# Allegro board Pot.brd
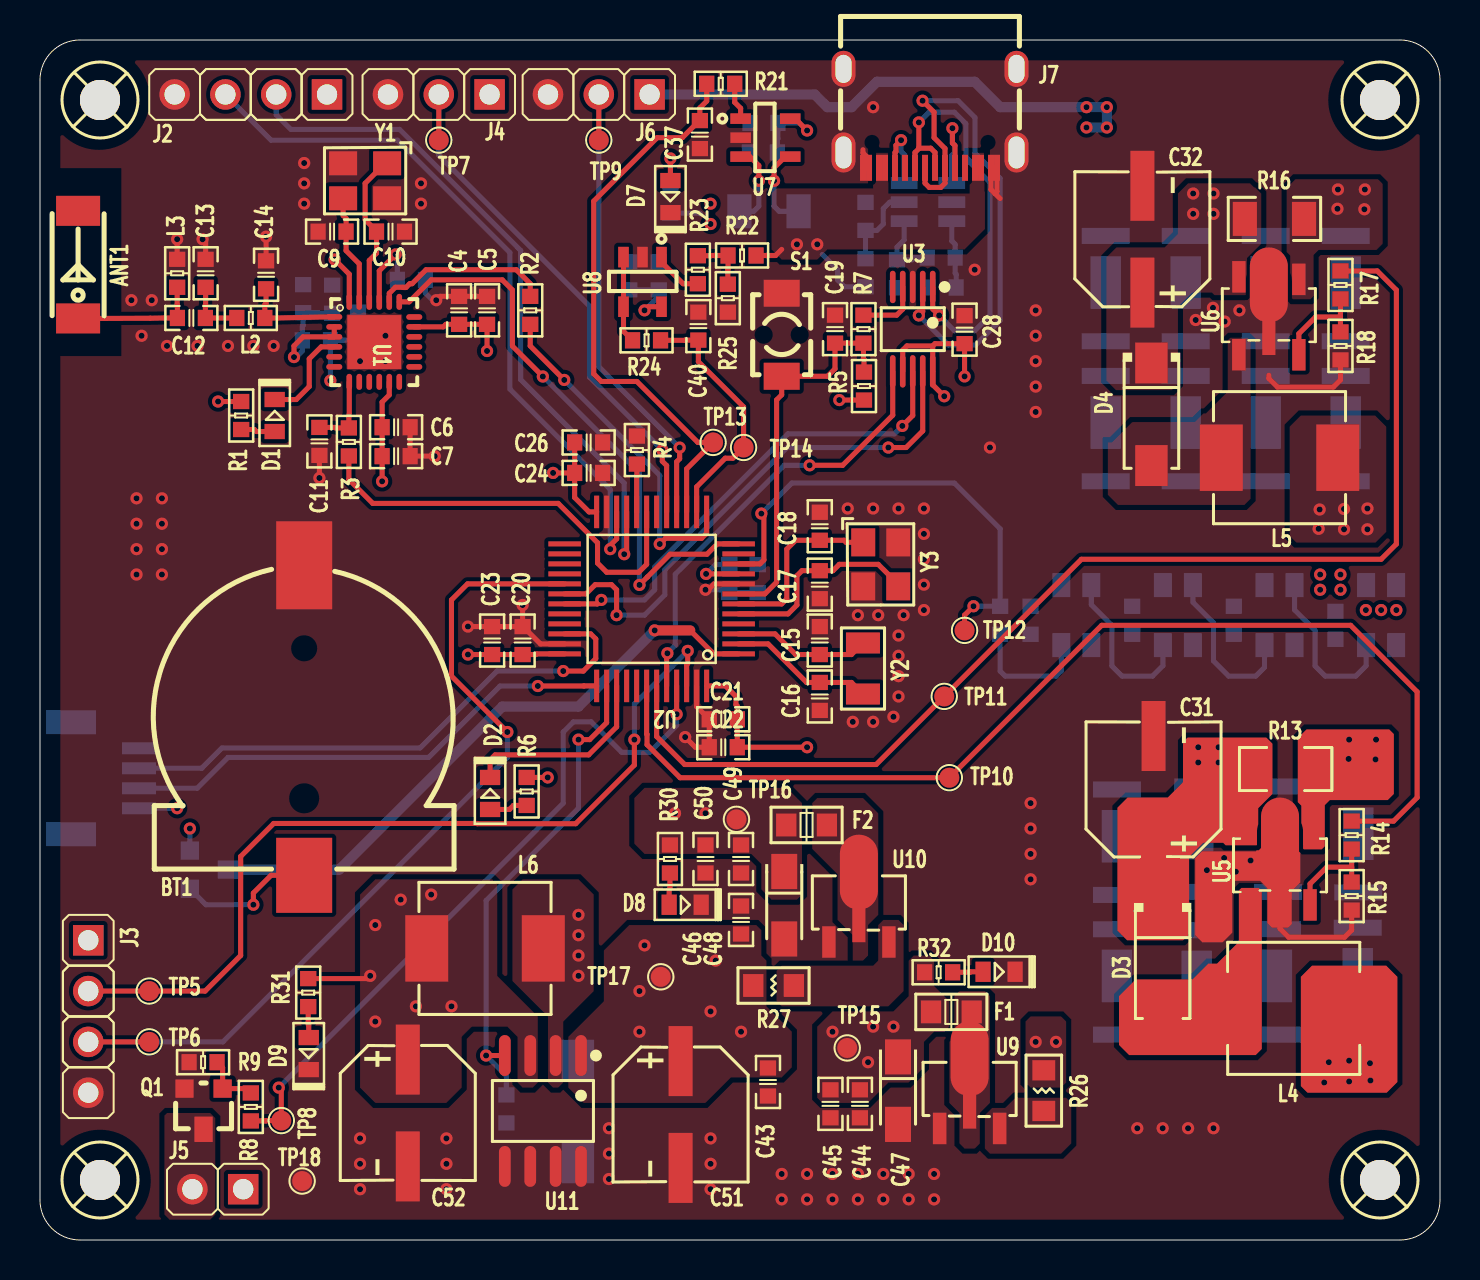
[diagram p0: board, top side]
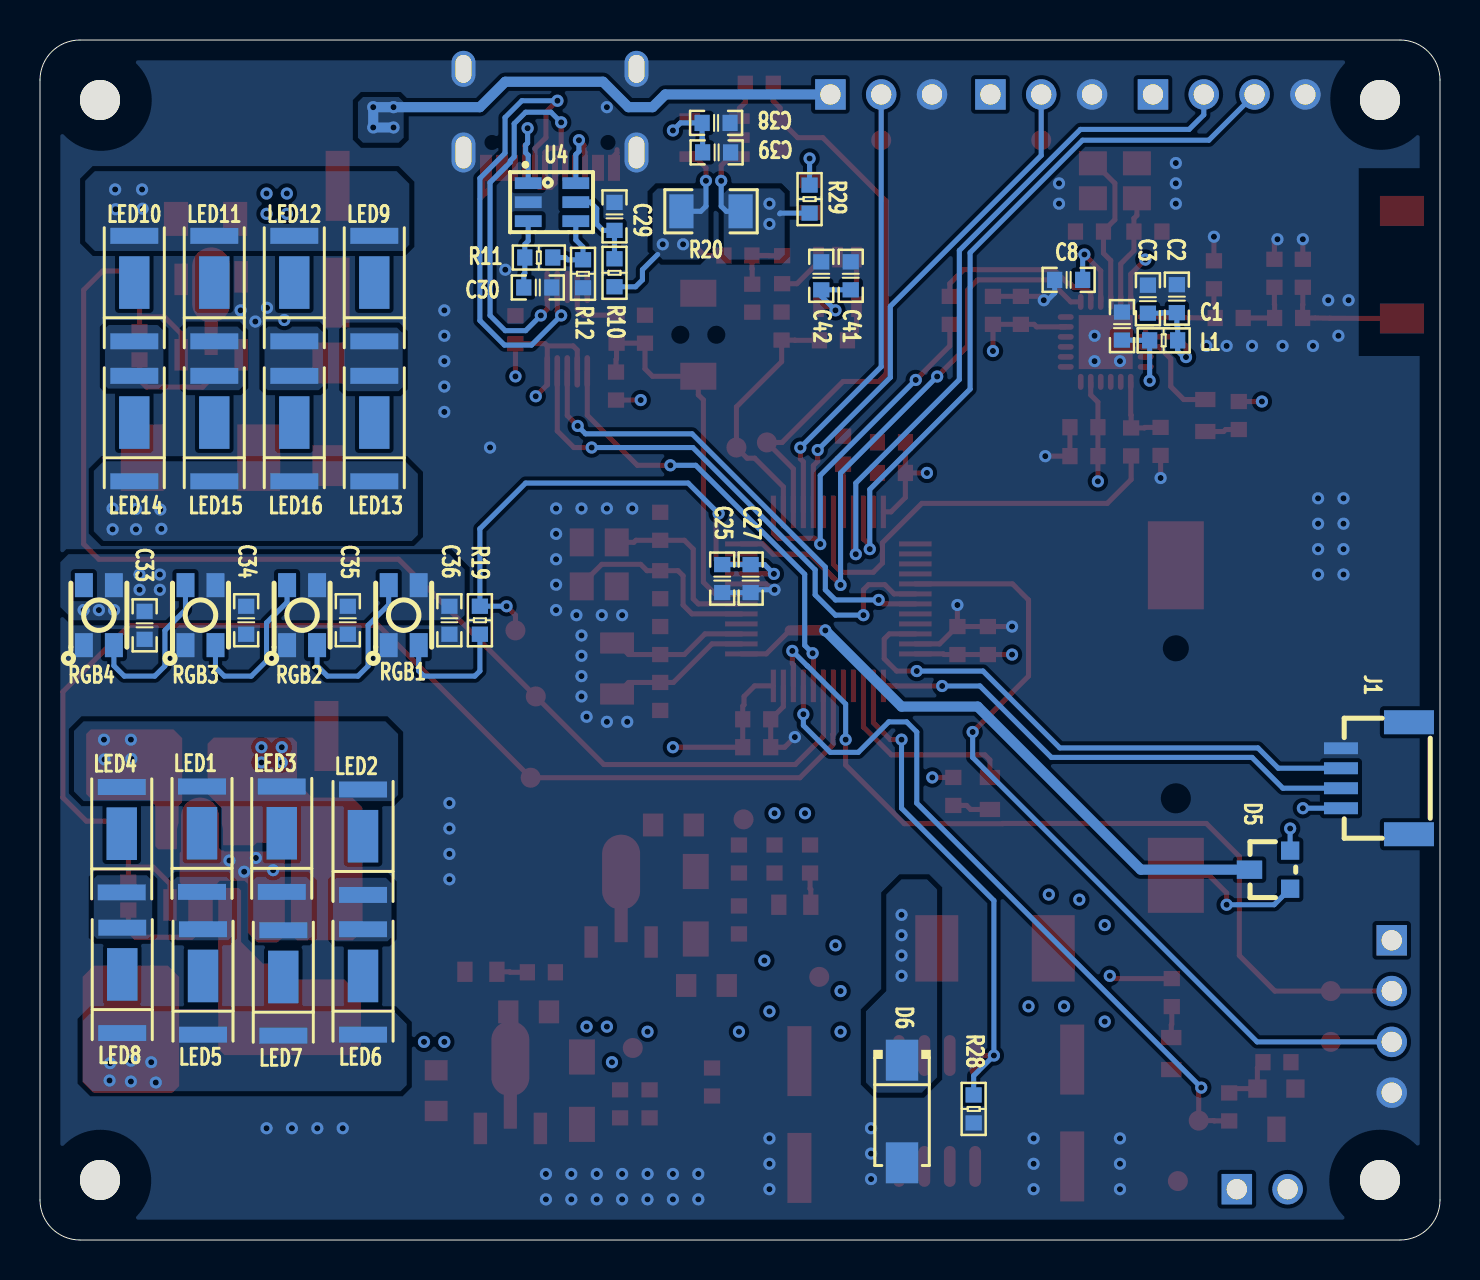
[diagram p1: board, bottom side, seen from below]

Outline 70 x 60 mm; copper layers: TOP, VCC, GND, BOTTOM. Coordinates in mm from the lower left corner of the outline.
Outline path: 0,58 0,2 arc(0.59,0.59) 2,0 68,0 arc(69.41,0.59) 70,2 70,58 arc(69.41,59.41) 68,60 2,60 arc(0.59,59.41) 0,58

## Design rules (mm)
constraint set DEFAULT: min track width 0.152
net group ESP_EN: nets ESP_EN N03599
net group ESP_TX: nets ESP_TX N07057
net group N412627: nets N412627 N971264
net group N412637: nets N412637 N970498
net group N412641: nets N412641 N977730
net group N412645: nets N412645 N976739
net group N412649: nets N412649 N976755
net group N412665: nets N412665 N980610
net group N971301: nets N971301 N971428
net group N972307: nets N972307 N972331
net group NRST: nets N970458 NRST
net group ANT: nets ANT N05484 N05522

## Placement (name value [footprint] x y rotation side)
ANT1  AN2051-245  [ANT-SMD-2X5_1]  1.91 48.77 90 top
BT1  CR1220  [CR1220_SMD]  13.21 25.98 270 top
C1  0.1uF  [C0603]  15.9 45.69 270 bottom
C2  0.1uF  [C0603]  13.16 47.07 270 bottom
C3  10uF  [C0603]  14.61 47.04 270 bottom
C4  0.1uF  [C0603]  20.95 46.48 270 top
C5  0.1uF  [C0603]  22.35 46.48 270 top
C6  0.1uF  [C0603]  17.81 40.64 180 top
C7  0.1uF  [C0603]  17.81 39.19 180 top
C8  10uF  [C0603]  18.57 48.01 180 bottom
C9  15pF  [C0603]  14.61 50.42 0 top
C10  15pF  [C0603]  17.53 50.42 0 top
C11  0.1uF  [C0603]  13.97 39.93 90 top
C12  0.1uF  [C0603]  7.57 46.1 0 top
C13  1.8pF  [C0603]  8.28 48.34 90 top
C14  1.8pF  [C0603]  11.3 48.26 90 top
C15  20pF  [C0603]  38.99 29.97 270 top
C16  20pF  [C0603]  38.99 27.18 270 top
C17  20pF  [C0603]  38.99 32.77 90 top
C18  20pF  [C0603]  38.99 35.69 90 top
C19  0.1uF  [C0603]  39.75 45.54 270 top
C20  2.2uF  [C0603]  24.13 29.97 270 top
C21  0.1uF  [C0603]  34.16 26.04 0 top
C22  2.2uF  [C0603]  34.16 24.64 0 top
C23  0.1uF  [C0603]  22.61 29.97 270 top
C24  2.2uF  [C0603]  27.43 38.35 180 top
C25  0.1uF  [C0603]  35.89 33.07 90 bottom
C26  2.2uF  [C0603]  27.43 39.88 180 top
C27  0.1uF  [C0603]  34.47 33.07 90 bottom
C28  0.1uF  [C0603]  46.23 45.52 270 top
C29  1uF  [C0603]  41.27 51.18 270 bottom
C30  0.1uF  [C0603]  45.11 47.62 0 bottom
C31  100uF  [CAP_SMD-6_3X7_7]  55.68 22.53 90 top
C32  100uF  [CAP_SMD-6_3X7_7]  55.12 50.04 90 top
C33  2.2uF  [C0603]  64.77 30.73 90 bottom
C34  2.2uF  [C0603]  59.69 30.99 90 bottom
C35  2.2uF  [C0603]  54.61 30.99 90 bottom
C36  2.2uF  [C0603]  49.53 30.99 90 bottom
C37  0.1uF  [C0603]  32.99 55.27 90 top
C38  0.1uF  [C0603]  36.2 55.85 0 bottom
C39  0.1uF  [C0603]  36.17 54.38 0 bottom
C40  0.1uF  [C0603]  32.92 45.69 270 top
C41  0.1uF  [C0603]  29.46 48.21 270 bottom
C42  0.1uF  [C0603]  30.94 48.21 270 bottom
C43  10uF  [C0603]  36.4 7.9 90 top
C44  10uF  [C0603]  41 6.81 90 top
C45  0.1uF  [C0603]  39.52 6.81 90 top
C46  10uF  [C0603]  35.05 16 270 top
C47  10uF  [CASE-A-3216]  42.9 7.47 270 top
C48  10uF  [CASE-A-3216]  37.21 16.74 270 top
C49  10uF  [C0603]  35.05 19.05 90 top
C50  0.1uF  [C0603]  33.27 19.05 90 top
C51  100uF  [CAP_SMD-6_3X7_7]  32.03 6.27 270 top
C52  100uF  [CAP_SMD-6_3X7_7]  18.39 6.35 270 top
D1  Green  [LED0603]  11.73 41.22 90 top
D2  Green  [LED0603]  22.5 22.33 90 top
D3  SS34  [SMA_DO-214AC]  56.13 13.78 270 top
D4  SS34  [SMA_DO-214AC]  55.57 41.29 270 top
D5  BAT54C,215  [SOT-23]  8.48 18.52 90 bottom
D6  SS34  [SMA_DO-214AC]  26.9 6.43 270 bottom
D7  Green  [LED0603]  31.52 52.17 270 top
D8  Green  [LED0603]  32.26 16.76 0 top
D9  Green  [LED0603]  13.44 9.32 270 top
D10  Green  [LED0603]  47.96 13.41 0 top
F1  FUSE  [F0805]  45.57 11.4 180 top
F2  FUSE  [F0805]  38.33 20.75 180 top
J1  SWD  [CON_1-4P-SMD]  3.25 23.09 90 bottom
J2  UART3  [CON_254-4P]  10.54 57.28 180 top
J3  FAN  [CON_254-4P]  2.41 11.18 270 top
J4  DHT11  [CON_254-3P]  19.94 57.28 180 top
J5  PUMP  [CON_254-2P]  8.89 3.81 180 top
J6  Liquid_Sensor  [CON_254-3P]  27.94 57.28 180 top
J7  Type-C 12P  [TYPE-C-12P]  44.5 56.08 180 top
L1  2nH  [R0603]  13.82 44.98 180 bottom
L2  2.4nH  [R0603]  10.54 46.1 180 top
L3  NC  [R0603]  6.86 48.34 270 top
L4  68uH 2.5A  [IND-SMD_7_1X6_6MM]  62.69 11.58 0 top
L5  68uH 2.5A  [IND-SMD_7_1X6_6MM]  61.98 39.12 0 top
L6  68uH 2.5A  [IND-SMD_7_1X6_6MM]  22.25 14.58 180 top
LED1  White  [SMD5730]  61.9 20.04 90 bottom
LED2  White  [SMD5730]  53.85 19.89 90 bottom
LED3  White  [SMD5730]  57.91 20.04 90 bottom
LED4  White  [SMD5730]  65.91 20.02 90 bottom
LED5  White  [SMD5730]  61.85 12.9 90 bottom
LED6  White  [SMD5730]  53.85 12.9 90 bottom
LED7  White  [SMD5730]  57.84 12.85 90 bottom
LED8  White  [SMD5730]  65.89 12.98 90 bottom
LED9  Warm_White  [SMD5730]  53.29 47.57 90 bottom
LED10  Warm_White  [SMD5730]  65.29 47.57 90 bottom
LED11  Warm_White  [SMD5730]  61.29 47.57 90 bottom
LED12  Warm_White  [SMD5730]  57.29 47.57 90 bottom
LED13  Warm_White  [SMD5730]  53.29 40.57 90 bottom
LED14  Warm_White  [SMD5730]  65.29 40.57 90 bottom
LED15  Warm_White  [SMD5730]  61.29 40.57 90 bottom
LED16  Warm_White  [SMD5730]  57.29 40.57 90 bottom
Q1  SI2302  [SOT-23]  8.18 6.58 180 top
R1  1K  [R0603]  10.06 41.22 270 top
R2  499R  [R0603]  24.51 46.48 90 top
R3  10K  [R0603]  15.44 39.9 90 top
R4  4.7K  [R0603]  29.84 39.5 270 top
R5  1K  [R0603]  41.2 42.7 90 top
R6  470R  [R0603]  24.33 22.43 270 top
R7  1K  [R0603]  41.17 45.54 90 top
R8  1R  [R0603]  10.54 6.65 270 top
R9  1K  [R0603]  8.15 8.89 180 top
R10  470R  [R0603]  41.27 48.36 270 bottom
R11  120K  [R0603]  45.06 49.12 180 bottom
R12  200K  [R0603]  42.85 48.31 270 bottom
R13  0.1R  [R1206]  62.28 23.55 180 top
R14  200R  [R0603]  65.58 20.24 270 top
R15  2.2K  [R0603]  65.58 17.2 90 top
R16  0.1R  [R1206]  61.72 51.05 180 top
R17  200R  [R0603]  65.02 47.75 270 top
R18  2.2K  [R0603]  65.02 44.7 90 top
R19  0R  [R0603]  48.01 30.99 270 bottom
R20  18mR  [R1206]  36.45 51.44 0 bottom
R21  10R  [R0603]  34.04 57.81 0 top
R22  12K  [R0603]  35.1 49.23 180 top
R23  1K  [R0603]  32.89 48.51 270 top
R24  10R  [R0603]  30.33 44.98 180 top
R25  3.3K  [R0603]  34.39 47.09 270 top
R26  1R  [R0805]  50.19 7.47 270 top
R27  1R  [R0805]  36.68 12.73 0 top
R28  10K  [R0603]  23.32 6.55 90 bottom
R29  1K  [R0603]  31.52 52.04 90 bottom
R30  1K  [R0603]  31.5 19.05 270 top
R31  1K  [R0603]  13.41 12.37 270 top
R32  1K  [R0603]  44.93 13.39 0 top
RGB1  WS2812  [RGB3528]  51.82 31.24 270 bottom
RGB2  WS2812  [RGB3528]  56.9 31.24 270 bottom
RGB3  WS2812  [RGB3528]  61.98 31.24 270 bottom
RGB4  WS2812  [RGB3528]  67.06 31.24 270 bottom
S1  KEY-SMD  [KEY_SMD]  37.08 45.26 270 top
TP1  M2  [SCREW_M2]  3 57 0 top
TP2  M2  [SCREW_M2]  67 57 0 top
TP3  M2  [SCREW_M2]  67 3 0 top
TP4  M2  [SCREW_M2]  3 3 0 top
TP5  SMD  [TP_SMD]  5.46 12.45 0 top
TP6  SMD  [TP_SMD]  5.46 9.91 0 top
TP7  SMD  [TP_SMD]  19.94 54.99 0 top
TP8  SMD  [TP_SMD]  12.06 5.97 0 top
TP9  SMD  [TP_SMD]  27.94 54.99 0 top
TP10  SMD  [TP_SMD]  45.47 23.11 0 top
TP11  SMD  [TP_SMD]  45.21 27.18 0 top
TP12  SMD  [TP_SMD]  46.23 30.48 0 top
TP13  SMD  [TP_SMD]  33.66 39.88 0 top
TP14  SMD  [TP_SMD]  35.18 39.62 0 top
TP15  SMD  [TP_SMD]  40.36 9.6 0 top
TP16  SMD  [TP_SMD]  34.82 21.03 0 top
TP17  SMD  [TP_SMD]  31.04 13.16 0 top
TP18  SMD  [TP_SMD]  13.11 2.95 0 top
U1  ESP8684H4  [QFN24-EP-4X4]  16.71 44.91 270 top
U2  STM32F103CBT6  [LQFP_48]  30.58 32.05 180 top
U3  CH340X  [MSOP-10]  43.64 45.54 180 top
U4  PW6603  [SOT23-6]  44.4 51.89 270 bottom
U5  PT4115-MS  [SOT-89-5]  62.03 18.72 270 top
U6  PT4115-MS  [SOT-89-5]  61.47 46.23 270 top
U7  INA180A2IDBVR  [SOT23-5]  36.27 55.12 270 top
U8  LM321  [SOT23-5]  30.12 47.9 180 top
U9  AMS1117_3.3  [SOT-89-3]  46.48 7.52 270 top
U10  AMS1117-5.0  [SOT-89-3]  40.94 16.84 270 top
U11  XL1509-5.0E1  [SOIC-8]  25.15 6.45 180 top
Y1  40MHz  [CRYSTAL_SMD3225-4P]  16.26 52.96 180 top
Y2  32.768kHz  [CRYSTAL_SMD3215-2P]  41.15 28.57 90 top
Y3  8Mhz  [CRYSTAL_SMD3225-4P]  42.04 33.78 270 top

## Library data of the parts
ANT1 = ANT
BT1 = BATTERY
C1-C30 C33-C46 C49 C50 = C
C31 C32 C51 C52 = CE
C47 C48 = CAP
D1 D2 D7-D10 = LED
D3 D4 D6 = DIODE SCHOTTKY
D5 = DIODE_Dual1
F1 F2 = FUSE
J1 = CON_6
J2 J3 = CON_4
J4 J6 = CON_3
J5 = CON_2
J7 = TYPE-C_12P_SMD
L1-L6 = L
LED1-LED16 = LED_3P
Q1 = MOSFET-N
R1-R32 = R
RGB1-RGB4 = WS2812
S1 = KEY_D_OPEN
TP1-TP18 = TP
U1 = ESP8684H4
U2 = STM32F103CxTx_48
U3 = CH340X
U4 = PW6603
U5 U6 = PT4115-MS
U7 = INA180
U8 = LM321
U9 U10 = AMS1117_SOT89
U11 = XL1509-5.0E1
Y1 Y3 = CRYSTAL_F
Y2 = CRYSTAL_D

## Footprints (pads in the part's own frame, mm; a bottom-side part is the same pattern mirrored in y, then rotated)
ANT-SMD-2X5_1
  rect 1.5x2.2 smd: 1(-2.69,0) 2(2.69,0)
C0603
  rect 0.762x0.813 smd: 1(-0.7,0) 2(0.7,0)
CAP_SMD-6_3X7_7
  rect 3.5x1.2 smd: 1(-2.67,0) 2(2.67,0)
CASE-A-3216
  rect 1.757x1.296 smd: 1(-1.686,0) 2(1.686,0)
CON_1-4P-SMD
  rect 0.6x1.7 smd: 1(-1.5,1.7) 2(-0.5,1.7) 3(0.5,1.7) 4(1.5,1.7)
  rect 1.2x2.5 smd: 5(2.8,-1.7) 6(-2.8,-1.7)
CON_254-2P
  rect 1.524x1.524 hole 1.016: 1(-1.27,1.27)
  round 1.524 hole 1.016: 2(1.27,1.27)
CON_254-3P
  rect 1.524x1.524 hole 1.016: 1(-2.54,0)
  round 1.524 hole 1.016: 2(0,0) 3(2.54,0)
CON_254-4P
  rect 1.524x1.524 hole 1.016: 1(-3.81,0)
  round 1.524 hole 1.016: 2(-1.27,0) 3(1.27,0) 4(3.81,0)
CR1220_SMD
  rect 3.75x2.8 smd: 1(7.75,0)
  rect 4.4x2.8 smd: 2(-7.75,0)
CRYSTAL_SMD3215-2P
  rect 1.05x1.7 smd: 1(-1.275,0) 2(1.275,0)
CRYSTAL_SMD3225-4P
  rect 1.4x1.2 smd: 1(-1.1,-0.875) 2(1.1,-0.875) 3(1.1,0.875) 4(-1.1,0.875)
F0805
  rect 1.016x1.143 smd: 1(-1.016,0) 2(1.016,0)
IND-SMD_7_1X6_6MM
  rect 2.15x3.32 smd: 1(-2.913,0) 2(2.913,0)
KEY_SMD
  rect 1.35x1.8 smd: 1(-2.075,0) 2(2.075,0)
LED0603
  rect 0.762x1.016 smd: 1(-0.8,0) 2(0.8,0)
LQFP_48
  rect 1.626x0.254 smd: 1(-4.35,2.75) 2(-4.35,2.25) 3(-4.35,1.75) 4(-4.35,1.25) 5(-4.35,0.75) 6(-4.35,0.25) 7(-4.35,-0.25) 8(-4.35,-0.75) 9(-4.35,-1.25) 10(-4.35,-1.75) 11(-4.35,-2.25) 12(-4.35,-2.75) 25(4.35,-2.75) 26(4.35,-2.25) 27(4.35,-1.75) 28(4.35,-1.25) 29(4.35,-0.75) 30(4.35,-0.25) 31(4.35,0.25) 32(4.35,0.75) 33(4.35,1.25) 34(4.35,1.75) 35(4.35,2.25) 36(4.35,2.75)
  rect 0.254x1.626 smd: 13(-2.75,-4.35) 14(-2.25,-4.35) 15(-1.75,-4.35) 16(-1.25,-4.35) 17(-0.75,-4.35) 18(-0.25,-4.35) 19(0.25,-4.35) 20(0.75,-4.35) 21(1.25,-4.35) 22(1.75,-4.35) 23(2.25,-4.35) 24(2.75,-4.35) 37(2.75,4.35) 38(2.25,4.35) 39(1.75,4.35) 40(1.25,4.35) 41(0.75,4.35) 42(0.25,4.35) 43(-0.25,4.35) 44(-0.75,4.35) 45(-1.25,4.35) 46(-1.75,4.35) 47(-2.25,4.35) 48(-2.75,4.35)
MSOP-10
  oval 0.28x1.62 smd: 1(-1,-2.11) 2(-0.5,-2.11) 3(0,-2.11) 4(0.5,-2.11) 5(1,-2.11) 6(1,2.11) 7(0.5,2.11) 8(0,2.11) 9(-0.5,2.11) 10(-1,2.11)
QFN24-EP-4X4
  oval 0.28x0.8 smd: 1(-1.25,-2) 2(-0.75,-2) 3(-0.25,-2) 4(0.25,-2) 5(0.75,-2) 6(1.25,-2) 13(1.25,2) 14(0.75,2) 15(0.25,2) 16(-0.25,2) 17(-0.75,2) 18(-1.242,2)
  oval 0.8x0.28 smd: 7(2,-1.25) 8(2,-0.75) 9(2,-0.25) 10(2,0.25) 11(2,0.75) 12(2,1.25) 19(-2,1.25) 20(-2,0.75) 21(-2,0.25) 22(-2,-0.25) 23(-2,-0.75) 24(-2,-1.25)
  rect 2.7x2.7 smd: 25(0.012,0)
R0603
  rect 0.762x0.813 smd: 1(-0.7,0) 2(0.7,0)
R0805
  rect 1.016x1.143 smd: 1(-1.016,0) 2(1.016,0)
R1206
  rect 1.207x1.701 smd: 1(-1.479,0) 2(1.479,0)
RGB3528
  rect 1.2x0.9 smd: 1(-1.5,0.75) 2(-1.5,-0.75) 3(1.5,-0.75) 4(1.5,0.75)
SCREW_M2
  round 2 hole 2: 1(0,0)
SMA_DO-214AC
  rect 2.047x1.62 smd: 1(2.565,0) 2(-2.565,0)
SMD5730
  rect 0.8x2.4 smd: 1(-2.635,0) 2(2.635,0)
  rect 2.63x1.52 smd: 3(0.3,0)
SOIC-8
  oval 0.588x2.045 smd: 1(-1.905,-2.772) 2(-0.635,-2.772) 3(0.635,-2.772) 4(1.905,-2.772) 5(1.905,2.772) 6(0.635,2.772) 7(-0.635,2.772) 8(-1.905,2.772)
SOT23-5
  rect 0.53x1.03 smd: 1(-0.95,-1.24) 2(0,-1.24) 3(0.95,-1.24) 4(0.95,1.24) 5(-0.95,1.24)
SOT23-6
  rect 0.59x1.34 smd: 1(-0.95,-1.19) 2(0,-1.19) 3(0.95,-1.19) 4(0.95,1.19) 5(0,1.19) 6(-0.95,1.19)
SOT-23
  rect 0.914x0.914 smd: 1(-0.953,-0.991) 2(0.953,-0.991)
  rect 0.914x1.27 smd: 3(0,1.041)
SOT-89-3
  rect 1.575x0.672 smd: 1(1.94,-1.5) 3(1.94,1.5)
  custom 5.377x1.9 smd: 2(-0.737,0)
SOT-89-5
  rect 1.575x0.672 smd: 1(1.966,-1.525) 3(1.966,1.474) 4(-1.803,1.473) 5(-1.93,-1.524)
  custom 5.377x1.9 smd: 2(-0.711,-0.025)
TP_SMD
  round 1.001 smd: 1(0,0)
TYPE-C-12P
  rect 0.3x1.3 smd: A1(-3.35,2.474) A4(-2.55,2.474) A5(-1.25,2.474) A6(-0.25,2.474) A7(0.25,2.474) A8(1.25,2.474) A9(2.55,2.474) A12(3.35,2.474) B1(3.05,2.474) B4(2.25,2.474) B5(1.75,2.474) B6(0.75,2.474) B7(-0.75,2.474) B8(-1.75,2.474) B9(-2.25,2.474) B12(-3.05,2.474)
  oval 1.2x2 hole 0.8x1.6: G1(-4.325,1.706) G2(4.325,1.706)
  oval 1.2x1.8 hole 0.8x1.4: G3(-4.325,-2.474) G4(4.325,-2.474)

## Nets
5V: C33.2 C34.2 C35.2 C36.2 C52.1 J3.1 J5.1 L6.2 R31.1 RGB1.1 RGB2.1 RGB3.1 RGB4.1 U11.3
GND: BT1.2 C1.1 C2.1 C3.1 C4.1 C5.1 C6.1 C7.1 C8.1 C9.1 C10.2 C11.1 C13.2 C14.2 C15.1 C16.2 C17.1 C18.2 C19.1 C20.1 C21.1 C22.1 C23.1 C24.1 C25.1 C26.1 C27.1 C28.1 C29.1 C30.1 C31.2 C32.2 C33.1 C34.1 C35.1 C36.1 C37.1 C38.1 C39.1 C40.1 C41.1 C42.1 C43.1 C44.1 C45.1 C46.1 C47.2 C48.2 C49.1 C50.1 C51.2 C52.2 D6.1 D7.2(\CATHODE\) D8.2(\CATHODE\) D9.2(\CATHODE\) D10.2(\CATHODE\) J1.4 J2.4 J3.4 J4.3 J6.3 J7.A1 J7.A12 J7.B1 J7.B12 J7.G1 J7.G2 J7.G3 J7.G4 L3.1 Q1.2(\S\) R4.1 R9.2 R12.2 R15.1 R18.1 R25.2 R28.1 RGB1.3(\VSS\) RGB2.3(\VSS\) RGB3.3(\VSS\) RGB4.3(\VSS\) S1.1 TP18.1 U1.25 U2.8 U2.23 U2.35 U2.47(\VSS_3\) U3.3 U4.2 U5.2(\VSS\) U6.2(\VSS\) U7.2 U8.2(\V-\) U9.1 U10.1 U11.5 U11.6 U11.7 U11.8 Y1.2 Y1.4 Y3.2 Y3.4
VBAT: D5.3 U2.1
VBUS: J7.A4 J7.A9 J7.B4 J7.B9(\VBUS4\) R10.2 R20.2 R22.1 U7.4
VCC3V3: C1.2 C4.2 C5.2 C6.2 C7.2 C8.2 C20.2 C21.2 C22.2 C23.2 C24.2 C25.2 C26.2 C27.2 C28.2 C44.2 C45.2 C47.1 D5.2 F1.2 J1.1 J2.1 J4.1 J6.1 L1.1 R1.1 R5.1 R6.1 R32.1 TP15.1 U1.11 U1.17 U1.21 U1.24 U2.9 U2.24 U2.36 U2.48 U3.7(\VCC\) U3.10
VCC5V: C38.2 C39.2 C41.2 C42.2 C48.1 C49.2 C50.2 F2.2 R30.1 TP16.1 U7.5(\VS\) U8.5
VIN: C31.1 C32.1 C43.2 C46.2 C51.1 D3.2 D4.2 R13.2 R16.2 R20.1 R26.1 R27.1 R29.1 TP17.1 U5.5 U6.5 U7.3 U11.1(\VIN\)
ANT: C14.1 L2.1 U1.1
BOOT0: U2.44 U3.6
CC1: J7.A5 U4.1
CC2: J7.B5 U4.6
ESP_EN: R3.1 U2.19
ESP_RX: U1.19 U2.12
ESP_TX: R2.1 U2.13
NRST: C19.2 R5.2 R7.1 S1.2 U2.7
RUNLED: D2.2(\CATHODE\) U2.39
SWCLK: J1.2 U2.37
SWDIO: J1.3 U2.34
UART1_RX: U2.31 U3.8
UART1_TX: U2.30 U3.9
UART3_RX: J2.3 U2.22
UART3_TX: J2.2 U2.21
N02117: C2.2 C3.2 L1.2 U1.2 U1.3
N02887: C9.2 U1.23(\XTAL_P\) Y1.3
N02894: C10.1 U1.22 Y1.1
N03599: C11.2 R3.2 U1.7
N05484: ANT1.1 C12.1 L3.2
N05522: C12.2 C13.1 L2.2
N07057: R2.2 U1.20
N07224: D1.2(\CATHODE\) U1.4
N07266: D1.1 R1.2
N07583: C17.2 U2.5 Y3.3
N07657: C18.1 U2.6 Y3.1
N412615: R28.2 U2.38 U11.4
N412619: J7.A7 J7.B7 U3.2
N412623: J7.A6 J7.B6 U3.1
N412627: C40.2 R24.1 TP14.1 U2.14
N412637: C37.2 R21.1 TP13.1 U2.15
N412641: R19.1 TP12.1 U2.10
N412645: R14.1 TP10.1 U2.42
N412649: R17.1 TP11.1 U2.43
N412653: J4.2 TP7.1 U2.17
N412657: J3.3 TP6.1 U2.29
N412661: J3.2 TP5.1 U2.46
N412665: R8.2 TP8.1 U2.45
N412669: J6.2 TP9.1 U2.16
N925463: BT1.1 D5.1
N926709: R26.2 U9.3
N926755: R27.2 U10.3
N965642: LED9.2 LED10.2 LED11.2 LED12.2 R16.1 U6.4
N965955: LED1.2 LED2.2 LED3.2 LED4.2 R13.1 U5.4
N970458: R7.2 U3.4
N970498: R21.2 U7.1
N970971: D6.2 L6.1 U11.2
N971264: R24.2 U8.3 U8.4
N971301: R23.2 U8.1
N971428: R22.2 R23.1 R25.1
N972307: C30.2 R11.1 U4.3(\VDD\)
N972331: R11.2 R12.1 U4.4
N972587: C29.2 R10.1 U4.5
N974356: D3.1 L4.1 U5.1
N974481: L4.2 LED5.1 LED6.1 LED7.1 LED8.1
N975120: D4.1 L5.1 U6.1
N975748: L5.2 LED13.1 LED14.1 LED15.1 LED16.1
N976739: R14.2 R15.2 U5.3
N976755: R17.2 R18.2 U6.3
N977400: RGB1.2 RGB2.4
N977412: RGB2.2 RGB3.4
N977424: RGB3.2 RGB4.4
N977730: R19.2 RGB1.4
N978475: LED1.1 LED5.2
N978501: LED2.1 LED6.2
N978505: LED3.1 LED7.2
N978542: LED4.1 LED8.2
N978748: LED9.1 LED13.2
N978752: LED10.1 LED14.2
N978756: LED11.1 LED15.2
N978760: LED12.1 LED16.2
N980521: J5.2 Q1.3
N980610: Q1.1 R8.1 R9.1
N983243: C15.2 U2.3 Y2.2
N983423: C16.1 U2.2 Y2.1
N983853: R4.2 U2.20
N984382: D2.1 R6.2
N984467: D7.1 R29.2
N984970: D8.1 R30.2
N985220: D9.1 R31.2
N985464: D10.1 R32.2
N9251661: F1.1 U9.2(\VOUT\)
N9263520: F2.1 U10.2(\VOUT\)

Pads without a net: ANT1 2; J1 5 6; J7 A8 B8; LED1 3; LED2 3; LED3 3; LED4 3; LED5 3; LED6 3; LED7 3; LED8 3; LED9 3; LED10 3; LED11 3; LED12 3; LED13 3; LED14 3; LED15 3; LED16 3; RGB4 2; TP1 1; TP2 1; TP3 1; TP4 1; U1 5 6 8 9 10 12 13 14 15 16 18; U2 4 11 18 25 26 27 28 32 33 40 41; U3 5

## Via types
v1: diameter 0.61, hole 0.305, TOP to BOTTOM, 225 vias

## Routing (per net, layer and track width the routed paths; a pad name or vN(x,y) marks a point on that pad's centre or on a via; arc(x,y) is an arc through that point)
5V: length 3.2
  TOP w0.254: v1(16.51,13.21) 16.37,13.07 R31.1
  vias: v1(16.76,15.75) v1(16.76,10.92) v1(18.03,17.02) v1(18.8,11.68) v1(19.56,17.27) v1(20.57,11.68) v1(64.01,33.27) v1(64.01,32.51) v1(65.02,33.27) v1(65.02,32.51) v1(66.29,31.5) v1(67.06,31.5) v1(67.82,31.5)
GND: length 41.3
  TOP w0.254: 62,15.73 62,15.57 62.43,15.14 65.23,15.14 65.58,15.49 R15.1 ; 47.75,52.32 47.55,52.53 J7.B12 J7.A1 47.85,52.42 47.75,52.32 ; 47.75,52.32 48.01,52.07 ; C20.1 v1(24.13,31.75) ; C20.1 C23.1 v1(21.4,30.67) ; C20.1 24.16,30.67 25.02,29.8 U2.35 ; C11.1 v1(13.97,38.1) ; R18.1 65.02,43 64.67,42.65 61.87,42.65 61.44,43.08 61.44,43.23 ; U2.8 33.7,32.8 33.41,32.51 v1(33.27,32.51) ; C6.1 C7.1 v1(19.74,39.19) ; 41.15,54.51 41.15,54.36 41.45,54.05 J7.B1 J7.A12 ; C13.2 8.28,49.89 v1(8.13,50.04) ; v1(19.81,46.99) 20,47.18 C4.1 C5.1 ; L3.1 v1(6.86,50.04) ; C14.2 v1(11.3,50.16) ; U2.47 32.83,26.67 C21.1 C22.1 32.77,24.64 v1(32.26,25.15)
  BOTTOM w0.254: v1(19.81,46.99) 19.62,46.99 19.27,47.35 C8.1 ; v1(33.27,32.51) 34.33,32.51 C27.1 C25.1
  vias: v1(4.57,46.99) v1(4.83,37.08) v1(4.83,35.81) v1(4.83,34.54) v1(4.83,33.27) v1(5.08,45.21) v1(5.59,46.99) v1(6.1,37.08) v1(6.1,35.81) v1(6.1,34.54) v1(6.1,33.27) v1(6.35,44.7) v1(7.87,44.7) v1(9.4,44.7) v1(10.67,44.7) v1(11.68,44.7) v1(13.21,53.85) v1(13.21,52.83) v1(13.21,51.82) v1(16,43.94) v1(16,5.08) v1(16,3.81) v1(16,2.54) v1(17.27,45.21) v1(17.27,43.94) v1(19.05,52.83) v1(19.05,51.82) v1(20.32,5.08) v1(20.32,3.81) v1(20.32,2.54) v1(28.45,5.59) v1(28.45,4.32) v1(28.45,3.05) v1(33.53,5.08) v1(33.53,3.81) v1(33.53,2.54) v1(37.08,3.3) v1(37.08,2.03) v1(38.35,3.3) v1(38.35,2.03) v1(39.62,3.3) v1(39.62,2.03) v1(40.39,36.58) v1(40.64,25.91) v1(40.89,31.24) v1(40.89,3.3) v1(40.89,2.03) v1(41.66,56.64) v1(41.66,36.58) v1(41.66,25.91) v1(41.91,31.24) v1(42.16,3.3) v1(42.16,2.03) v1(42.67,26.16) v1(42.93,36.58) v1(42.93,30.23) v1(42.93,29.21) v1(42.93,28.19) v1(42.93,27.18) v1(43.18,31.24) v1(43.43,3.3) v1(43.43,2.03) v1(44.2,36.58) v1(44.2,35.31) v1(44.2,34.04) v1(44.2,32.77) v1(44.2,31.5) v1(44.7,3.3) v1(44.7,2.03) v1(46.74,48.51) v1(47.5,39.62) v1(49.53,21.84) v1(49.53,20.57) v1(49.53,19.3) v1(49.53,18.03) v1(49.78,46.48) v1(49.78,45.21) v1(49.78,43.94) v1(49.78,42.67) v1(49.78,41.4) v1(54.86,5.59) v1(56.13,5.59) v1(57.4,5.59) v1(57.78,46) v1(58.34,18.49) v1(58.65,46.61) v1(58.67,5.59) v1(59.23,45.92) v1(59.21,19.1) v1(59.79,18.41) v1(59.97,46.48) v1(60.53,18.97)
VBAT: length 30.8
  TOP w0.254: U2.1 33.69,29.3 32.51,30.48
  TOP w0.508: v1(30.73,30.48) 32.51,30.48
  BOTTOM w0.508: v1(30.73,30.48) 26.92,26.67 23.11,26.67 14.96,18.52 D5.3
VBUS: length 8.8
  TOP w0.254: U7.4 37.26,54.17 36.7,53.61 v1(36.7,52.96) ; 37.08,49.53 36.78,49.23 R22.1
  BOTTOM w0.254: 39.12,49.28 39.88,48.51 39.88,48.01 40.22,47.66 R10.2 ; v1(36.7,52.96) 36.7,51.69 36.96,51.44 R20.2
  vias: v1(37.85,49.78) v1(38.86,49.78)
VCC3V3: length 83.5
  TOP w0.254: U1.21 16.96,48.46 v1(17.78,49.28) ; C24.2 C26.2 ; C24.2 v1(25.65,38.35) ; C24.2 26.73,37.12 27.45,36.4 U2.24 ; 44.64,44.7 43.34,44.7 43.14,44.5 U3.7 ; 44.64,44.7 U3.10 44.64,42.76 v1(45.21,42.19) ; 44.64,44.7 44.75,44.82 C28.2 v1(46.23,43.18) ; v1(22.35,44.45) C5.2 C4.2 20.29,45.78 20.17,45.66 U1.17 ; R6.1 v1(25.39,23.13) ; v1(38.35,24.64) C22.2 C21.2 34.86,26.7 34.8,26.76 34.8,27.18 34.27,27.7 U2.48 ; R1.1 v1(8.9,41.92) ; v1(14.73,49.02) 15.46,48.29 U1.24 ; U2.36 24.82,29.3 24.79,29.27 C20.2 C23.2 v1(21.4,29.27) ; U2.9 v1(33.3,33.3) ; R5.1 v1(39.97,42) ; v1(17.11,37.93) C7.2 C6.2 17.11,41.9 17.46,42.25 U1.11
  BOTTOM w0.254: C8.2 17.87,49.19 v1(17.78,49.28) ; C1.2 15.16,44.99 15.15,44.98 L1.1 v1(14.52,42.97) ; D5.2 v1(7.49,20.57) ; C25.2 C27.2 33.77,33.77 v1(33.3,33.3) ; J1.1 v1(6.86,21.59)
  BOTTOM w0.508: v1(52.32,55.63) v1(53.34,55.63) v1(53.34,56.64) v1(52.32,56.64) 48.01,56.64 46.74,57.91 41.85,57.91 40.58,56.64 39.37,56.64 38.73,57.28 J6.1
  vias: v1(39.62,10.41) v1(41.4,8.89) v1(41.66,10.67) v1(42.67,10.67)
VCC5V: length 11.6
  TOP w0.254: v1(38.35,55.48) 37.76,56.07 U7.5 ; v1(30.23,46.48) 30.41,46.66 U8.5
  VCC w0.508: 35.81,53.85 37.59,53.85 38.35,54.61 v1(38.35,55.48)
  BOTTOM w0.254: C41.2 C42.2 30.94,47.19 v1(30.23,46.48) ; C39.2 36.87,55.04 36.89,55.07 C38.2 37.97,55.85 v1(38.35,55.48)
  vias: v1(31.75,21.34) v1(33.27,21.34)
VIN: length 5.7
  TOP w0.254: v1(35.94,52.96) 35.94,53.72 35.49,54.17 U7.3
  BOTTOM w0.254: 33.02,51.31 32.98,51.34 R29.1 ; v1(35.94,52.96) 35.94,51.69 35.69,51.44 R20.1
  vias: v1(29.97,12.45) v1(29.97,10.41) v1(30.23,14.73) v1(33.53,51.82) v1(33.53,50.8) v1(33.53,11.43) v1(33.78,13.97) v1(35.05,10.41) v1(49.78,9.91) v1(50.8,9.91) v1(57.66,52.32) v1(57.66,51.31) v1(57.91,24.64) v1(57.91,23.88) v1(58.67,52.32) v1(58.67,51.31) v1(58.93,24.64) v1(58.93,23.88)
ANT: length 5
  TOP w0.254: U1.1 14.45,46.16 11.88,46.1 L2.1 11.24,46.76 11.3,46.82 C14.1
BOOT0: length 22.1
  TOP w0.254: U3.6 42.64,41.24 40.13,38.73 v1(38.48,38.73) ; v1(31.37,29.34) 31.33,29.3 U2.44
  BOTTOM w0.254: v1(38.48,38.73) 37.21,38.73 31.76,33.29 31.76,29.73 v1(31.37,29.34)
CC1: length 4.9
  TOP w0.254: v1(45.62,55.59) 45.62,54.85 45.75,54.72 J7.A5
  BOTTOM w0.254: U4.1 45.59,54.24 45.72,54.37 45.72,54.75 45.62,54.85 v1(45.62,55.59)
CC2: length 3.7
  TOP w0.254: v1(43.05,54.99) 42.8,54.74 42.8,54.42 42.75,54.38 J7.B5
  BOTTOM w0.254: v1(43.05,54.99) 43.05,54.43 43.21,54.28 U4.6
ESP_EN: length 21.4
  TOP w0.254: R3.1 15.44,38.02 16.64,36.83 25.91,36.83 27.88,34.86 27.88,33.85 28.34,33.39 29.94,33.39 30.33,33.78 U2.19
ESP_RX: length 29.5
  TOP w0.254: U1.19 18.46,46.91 19.56,48.01 23.11,48.01 23.62,47.5 23.62,44.69 v1(25.14,43.18) ; v1(29.97,32.75) 30.37,33.15 31.51,34.29 33.35,34.29 33.86,34.8 U2.12
  BOTTOM w0.254: v1(29.97,32.75) 29.97,33.31 29.97,38.34 v1(25.14,43.18)
ESP_TX: length 17.3
  TOP w0.254: U2.13 33.33,35.34 33.08,35.09 31.28,35.09 v1(30.99,34.8) ; R2.1 24.51,44.7 v1(26.21,43)
  BOTTOM w0.254: v1(30.99,34.8) 30.99,38.23 v1(26.21,43)
NRST: length 19.5
  TOP w0.254: U2.7 36.24,32.3 36.83,32.89 36.83,42 37.08,42.26 S1.2 39.38,43.19 39.75,43.56 C19.2 R7.1 41.17,44.06 41.2,44.03 R5.2
RUNLED: length 9.9
  TOP w0.254: D2.2 22.5,24 22.76,24.26 27.43,24.26 28.83,25.66 U2.39
SWCLK: length 25
  TOP w0.254: v1(24.89,27.7) 27.19,27.7 27.2,27.7 U2.37
  BOTTOM w0.254: J1.2 7.86,22.59 9.4,24.13 19.43,24.13 23,27.7 v1(24.89,27.7)
SWDIO: length 27.8
  TOP w0.254: v1(26.16,28.45) 27.17,28.45 27.79,29.07 27.79,30.05 27.53,30.3 U2.34
  BOTTOM w0.254: v1(26.16,28.45) 22.85,28.45 19.01,24.6 9.1,24.6 8.09,23.59 J1.3
UART1_RX: length 24.2
  TOP w0.254: U2.31 27.87,31.8 v1(28.07,32) ; v1(43.12,40.7) 43.64,41.22 U3.8
  BOTTOM w0.254: v1(43.12,40.7) 42.72,40.31 37.4,40.31 30.73,33.65 30.73,32.51 30.23,32 v1(28.07,32)
UART1_TX: length 27
  TOP w0.254: v1(42.42,39.62) 43.31,39.62 44.14,40.45 U3.9 ; U2.30 27.3,32.3 27.76,32.77 28.57,32.77 28.83,32.51 v1(28.83,31.24)
  BOTTOM w0.254: v1(28.83,31.24) 30.23,31.24 31.24,32.26 31.24,33.51 37.36,39.62 v1(42.42,39.62)
UART3_RX: length 36.4
  TOP w0.254: U2.22 28.83,35.05 28.51,34.73 v1(28.51,34.54)
  BOTTOM w0.254: v1(28.51,34.54) 28.51,37.53 23.5,42.55 23.5,49.37 17.87,54.99 11.56,54.99 J2.3
UART3_TX: length 35.5
  TOP w0.254: v1(29.21,34.29) 29.33,34.41 U2.21
  BOTTOM w0.254: J2.2 11.81,56.26 12.54,55.53 17.98,55.53 24.03,49.47 24.03,43.02 29.21,37.85 v1(29.21,34.29)
N02117: length 7.2
  TOP w0.254: U1.2 U1.3 13.15,45.16 12.7,44.71 v1(12.7,44.15)
  BOTTOM w0.254: v1(12.7,44.15) 12.75,44.2 12.86,44.2 13.12,44.45 L1.2 13.12,45.69 13.16,45.73 C2.2 13.92,46.37 13.94,46.34 C3.2
N02887: length 5.5
  TOP w0.254: U1.23 15.96,48.81 15.3,49.47 C9.2 15.3,51.08 15.16,51.23 Y1.3
N02894: length 7.8
  TOP w0.254: U1.22 16.46,48.98 16.83,49.34 C10.1 16.83,50.44 16.26,51.01 16.26,52.83 17.26,53.83 Y1.1
N03599: length 3.8
  TOP w0.254: U1.7 15.46,41.26 15.44,41.24 R3.2 14.78,40.6 14.76,40.63 C11.2
N05484: length 6.5
  TOP w0.254: L3.2 6.86,46.77 6.87,46.76 C12.1 6.23,46.1 5.52,46.09 arc(4.39,46.08) 3.26,46.08 ANT1.1
N05522: length 3.1
  TOP w0.254: L2.2 C12.2 8.27,46.76 8.28,46.77 C13.1
N07057: length 8.9
  TOP w0.254: R2.2 24.51,47.82 23.81,48.51 19.3,48.51 18.6,47.81 18.49,47.81 18.3,47.62 18.17,47.62 18.16,47.64 17.77,47.64 17.46,47.33 U1.20
N07224: length 4.9
  TOP w0.254: D1.2 12.81,42.02 13.46,42.67 13.46,44.06 14.06,44.66 U1.4
N07266: length 1.7
  TOP w0.254: D1.1 10.82,40.42 10.72,40.52 R1.2
N07583: length 10.4
  TOP w0.254: Y3.3 42.91,32.78 41.91,33.78 39.97,33.78 39.65,33.47 C17.2 38.1,33.47 37.85,33.21 37.85,31.75 37.4,31.3 U2.5
N07657: length 9
  TOP w0.254: U2.6 37.08,31.8 37.34,32.06 37.34,34.54 37.78,34.99 C18.1 40.2,34.99 40.31,34.88 Y3.1
N412615: length 24.6
  TOP w0.254: U2.38 28.33,25.87 27.48,25.02 v1(26.92,25.02) ; U11.4 v1(22.31,9.22)
  BOTTOM w0.254: v1(26.92,25.02) 26.92,21.59 22.31,16.97 v1(22.31,9.22) 23.32,8.21 R28.2
N412619: length 26.9
  TOP w0.254: v1(44.13,56.96) 44.7,56.39 44.7,55.12 45.25,54.57 J7.B7 45.25,52.84 45.04,52.63 44.46,52.63 44.25,52.84 J7.A7 ; v1(43.94,46.23) 44.14,46.42 U3.2
  BOTTOM w0.254: v1(44.13,56.96) 45.91,56.96 46.75,56.12 46.75,54.34 48.01,53.09 48.01,45.97 46.78,44.75 45.42,44.75 v1(43.94,46.23)
N412623: length 21.6
  TOP w0.254: 43.96,54.59 43.75,54.38 J7.B6 ; 43.96,54.59 43.94,54.61 v1(43.94,55.88) ; 43.96,54.59 44.54,54.59 44.75,54.38 J7.A6 ; v1(44.96,46.23) 44.64,46.55 U3.1
  BOTTOM w0.254: v1(44.96,46.23) 45.72,45.47 46.74,45.47 47.5,46.23 47.5,52.88 46.48,53.89 46.48,53.96 46.29,54.15 46.29,55.82 45.72,56.39 44.45,56.39 v1(43.94,55.88)
N412627: length 12.6
  TOP w0.254: R24.1 32.25,44.98 32.26,44.99 C40.2 32.92,43.92 35.18,41.66 TP14.1 34.65,39.09 34.26,39.09 32.83,37.66 U2.14
N412637: length 29
  TOP w0.254: R21.1 33.34,56.95 32.99,56.61 C37.2 32.97,55.97 32.12,55.12 30.86,55.12 27.69,51.94 27.69,43.31 28.07,42.93 29.84,42.93 32.89,39.88 TP13.1 32.33,38.55 U2.15
N412641: length 23.8
  TOP w0.254: U2.10 36,33.8 36.2,34 36.2,36.2 v1(36.07,36.32) ; TP12.1 46.23,31.24 v1(46.67,31.69)
  BOTTOM w0.254: v1(36.07,36.32) 37.59,37.85 45.72,37.85 48.01,35.56 R19.1 v1(46.67,31.69)
N412645: length 55.7
  TOP w0.254: R14.1 67.68,20.94 68.86,22.12 68.86,27.41 65.53,30.73 53.09,30.73 TP10.1 32,23.11 30.35,24.77 30.35,25.28 30.33,25.3 U2.42
N412649: length 60.6
  TOP w0.254: R17.1 66.86,48.45 67.82,47.5 67.82,34.8 67.06,34.04 52.07,34.04 TP11.1 41.81,23.77 32.23,23.77 30.83,25.18 U2.43
N412653: length 27.9
  TOP w0.254: U2.17 31.33,38.72 31.11,38.94 v1(31.11,39.5) ; TP7.1 J4.2
  BOTTOM w0.254: v1(31.11,39.5) 27.48,43.13 27.48,46.69 19.94,54.23 J4.2
N412657: length 44.9
  TOP w0.254: TP6.1 J3.3 ; U2.29 21.37,32.8 20.57,32 20.57,28.19 v1(23.37,25.4)
  BOTTOM w0.254: v1(23.37,25.4) 23.37,24.13 9.14,9.91 J3.3
N412661: length 43.5
  TOP w0.254: U2.46 32.33,28.77 32.38,28.82 v1(32.38,29.45) ; v1(29.72,25.02) 29.72,23.75 26.78,20.82 21.86,20.82 21.85,20.83 11.68,20.83 10.03,19.18 10.03,14.22 8.26,12.45 TP5.1 J3.2
  BOTTOM w0.254: v1(29.72,25.02) 29.72,26.8 31.62,28.7 31.63,28.7 v1(32.38,29.45)
N412665: length 35.9
  TOP w0.254: R8.2 11.3,5.95 11.31,5.97 TP8.1 12.06,7.49 v1(11.94,7.62) ; U2.45 v1(31.83,26.29)
  BOTTOM w0.254: v1(31.83,26.29) 31.83,25.73 30.49,24.38 29.08,24.38 27.56,25.91 26.67,25.91 26.16,25.4 26.16,21.84 v1(11.94,7.62)
N412669: length 24.9
  TOP w0.254: TP9.1 J6.2 ; v1(31.98,39.62) 31.98,39.06 31.83,38.91 U2.16
  BOTTOM w0.254: v1(31.98,39.62) 27.94,43.66 J6.2
N925463: length 7
  TOP w0.254: v1(10.67,16.76) 10.67,17.35 11.55,18.23 BT1.1
  BOTTOM w0.254: D5.1 8.29,16.76 v1(10.67,16.76)
N965642:
  vias: v1(64.9,52.53) v1(64.87,51.56) v1(66.24,52.53) v1(66.22,51.54)
N965955:
  vias: v1(65.43,24.05) v1(65.46,25.02) v1(66.8,25.02) v1(66.78,24.03)
N970458: length 3.2
  TOP w0.254: U3.4 43.14,46.55 42.83,46.24 R7.2
N970498: length 1.9
  TOP w0.254: U7.1 35.03,56.59 34.74,56.88 R21.2
N970971:
  vias: v1(26.92,16.26) v1(26.92,15.24) v1(26.92,14.22) v1(26.92,13.21)
N971264: length 4.3
  TOP w0.254: R24.2 29.17,45.44 U8.4 U8.3
N971301: length 2.5
  TOP w0.254: U8.1 31.07,48.89 32.15,47.81 R23.2
N971428: length 3
  TOP w0.254: R25.1 34.39,48.55 34.4,48.56 R22.2 33.56,49.23 33.55,49.21 R23.1
N972307: length 3.4
  BOTTOM w0.254: U4.3 45.59,49.95 45.76,49.78 R11.1 45.76,48.34 45.81,48.29 C30.2
N972331: length 3.6
  BOTTOM w0.254: U4.4 43.21,50.01 42.85,49.65 R12.1 43.61,49.01 43.72,49.12 R11.2
N972587: length 4.4
  BOTTOM w0.254: R10.1 C29.2 41.85,50.48 42.16,50.8 42.16,51.57 42.49,51.89 U4.5
N974481:
  vias: v1(64.21,7.87) v1(64.44,8.89) v1(65.46,8.97) v1(65.46,7.92) v1(66.5,8.84) v1(66.52,7.98)
N975748:
  vias: v1(63.93,35.56) v1(63.98,36.53) v1(65.2,36.55) v1(65.2,35.53) v1(66.37,36.58) v1(66.37,35.53)
N976739: length 5.1
  TOP w0.254: 65.58,18.64 64.34,18.64 63.5,17.81 U5.3 ; 65.58,18.64 R14.2 ; 65.58,18.64 R15.2
N976755: length 5.1
  TOP w0.254: R17.2 65.02,46.15 ; 65.02,46.15 R18.2 ; 65.02,46.15 63.78,46.15 62.94,45.31 U6.3
N977400: length 8.5
  BOTTOM w0.254: RGB1.2 52.57,31.76 53.59,30.73 53.59,28.7 54.1,28.19 55.63,28.19 56.15,28.71 RGB2.4
N977412: length 8.4
  BOTTOM w0.254: RGB2.2 57.65,31.89 58.67,30.86 58.67,28.96 59.44,28.19 60.79,28.19 61.23,28.63 RGB3.4
N977424: length 8.5
  BOTTOM w0.254: RGB4.4 66.31,28.71 65.79,28.19 64.26,28.19 63.75,28.7 63.75,30.48 62.73,31.51 RGB3.2
N977730: length 6.4
  BOTTOM w0.254: R19.2 48.01,28.45 48.26,28.19 50.8,28.19 51.07,28.46 RGB1.4
N980610: length 2.9
  TOP w0.254: R8.1 10.33,7.57 Q1.1 9.13,8.61 R9.1
N983243: length 6.9
  TOP w0.254: U2.3 36.75,30.3 37.78,29.27 C15.2 40.57,29.27 Y2.2
N983423: length 7.3
  TOP w0.254: Y2.1 40.57,27.88 C16.1 38.33,27.88 36.4,29.8 U2.2
N983853: length 2.4
  TOP w0.254: U2.20 29.83,38.15 29.84,38.16 R4.2
N984382: length 1.9
  TOP w0.254: R6.2 23.67,21.73 23.47,21.53 D2.1
N984467: length 2.4
  TOP w0.254: D7.1 v1(31.52,54.08)
  BOTTOM w0.254: R29.2 v1(31.52,54.08)
N984970: length 1.6
  TOP w0.254: D8.1 31.46,17.53 31.5,17.56 R30.2
N985220: length 1.6
  TOP w0.254: R31.2 13.41,10.78 13.44,10.76 D9.1
N985464: length 1.5
  TOP w0.254: R32.2 46.49,13.39 46.52,13.41 D10.1

## Copper pours and planes (outline as drawn; the poured copper is in the pictures)
5V on TOP: 24.89,11.18 24.89,7.87 24.64,7.62 24.13,7.62 23.88,7.87 23.88,10.16 23.37,10.67 21.59,10.67 21.08,10.16 21.08,7.62 20.32,6.86 16.76,6.86 16,7.62 16,17.27 16.76,18.03 22.61,18.03 22.86,17.78 22.86,13.21
5V on BOTTOM: 49.53,34.29 68.58,34.29 68.98,33.89 68.98,31.65 68.33,30.99 49.02,30.99 48.77,31.24 48.77,33.53
5V on VCC: 60.71,34.29 68.07,34.29 68.98,33.38 68.98,2 68.98,1.93 68.07,1.02 68,1.02 2.29,1.02 1.02,2.29 1.02,17.02 2.03,18.03 20.57,18.03 21.34,17.27 21.34,8.89 25.91,4.32 58.17,4.32 59.69,5.84 59.69,33.27
GND on TOP (solid shape): 62.81,21.31 62.81,19.55 63.02,19.35 63.02,17.88 62.59,17.45 62.59,15.8 62.41,15.62 61.59,15.62 61.37,15.85 61.37,17.6 61.01,17.96 59.77,17.96 59.61,17.81 59.61,15.37 59.13,14.88 58.12,14.88 57.76,15.24 57.76,19.1 58.09,19.43 60.78,19.43 60.83,19.48 60.94,19.48 61.16,19.71 61.16,21.16 61.37,21.36 62.76,21.36
GND on TOP: 68.98,2 68.7,1.3 68,1.02 2,1.02 1.3,1.3 1.02,2 1.02,44.2 4.06,44.2 4.06,53.59 1.02,53.59 1.02,58 1.3,58.7 2,58.98 68,58.98 68.7,58.7 68.98,58 ; 8 cut-outs
GND on TOP: 60.22,46.94 60.38,47.09 60.38,48.44 60.81,48.87 62.2,48.87 62.46,48.62 62.46,45.39 62.03,44.96 62.03,43.31 61.85,43.13 61.04,43.13 60.81,43.36 60.81,45.11 60.45,45.47 59.21,45.47 59.05,45.31 59.05,42.88 58.57,42.39 57.56,42.39 57.2,42.75 57.2,46.66 57.48,46.94
GND on TOP: 6.6,9.78 8,9.78 8.13,9.65 8.13,7.24 7.87,6.99 5.97,6.99 5.08,6.1 1.27,6.1 1.02,6.35 1.02,8.26 1.52,8.76 5.59,8.76
GND on BOTTOM: 68.98,2 68.7,1.3 68,1.02 2,1.02 1.3,1.3 1.02,2 1.02,44.2 4.06,44.2 4.06,53.59 1.02,53.59 1.02,58 1.3,58.7 2,58.98 68,58.98 68.7,58.7 68.98,58 ; 5 cut-outs
GND on GND: 68.98,2 68.7,1.3 68,1.02 2,1.02 1.3,1.3 1.02,2 1.02,44.2 4.06,44.2 4.06,53.59 1.02,53.59 1.02,58 1.3,58.7 2,58.98 68,58.98 68.7,58.7 68.98,58
VBUS on TOP: 46.48,54.36 47.24,54.36 47.24,50.55 46.23,49.53 39.37,49.53 38.86,49.02 37.08,49.02 36.58,49.53 36.58,52.32 36.83,52.58 41.66,52.58 41.66,54.36 42.42,54.36 42.42,52.32 46.48,52.32
VBUS on BOTTOM: 36.83,52.58 39.12,52.58 39.37,52.32 39.37,49.53 38.86,49.02 37.08,49.02 36.58,49.53 36.58,52.32
VCC3V3 on TOP: 39.12,6.86 41.4,6.86 42.42,7.87 43.43,7.87 44.2,8.64 44.2,9.91 44.7,10.41 45.21,10.41 45.47,10.67 45.47,11.94 44.7,12.7 44.7,13.97 44.45,14.22 43.69,14.22 43.43,13.97 43.43,12.19 42.67,11.43 39.62,11.43 38.86,10.67 38.86,7.11
VCC3V3 on BOTTOM: 52.07,57.15 53.85,57.15 54.1,56.9 54.1,55.12 53.85,54.86 52.07,54.86 51.82,55.12 51.82,56.9
VCC3V3 on VCC: 68.98,2 68.7,1.3 68,1.02 2,1.02 1.3,1.3 1.02,2 1.02,44.2 4.06,44.2 4.06,53.59 1.02,53.59 1.02,58 1.3,58.7 2,58.98 68,58.98 68.7,58.7 68.98,58 ; 1 cut-out
VCC5V on TOP: 30.23,19.3 35.56,19.3 36.07,18.8 36.07,17.53 36.58,17.02 37.85,17.02 38.1,17.27 38.1,21.84 37.34,22.61 30.23,22.61 29.72,22.1 29.72,19.81
VCC5V on VCC: 34.54,22.61 30.99,22.61 30.48,22.1 30.48,20.32 30.99,19.81 37.08,19.81 37.59,20.32 37.59,48.26 36.83,49.02 32.77,49.02 32.26,49.53 32.26,52.58 33.02,53.34 35.56,53.34 36.07,53.85 36.07,54.61 35.56,55.12 30.23,55.12 28.45,53.34 28.45,46.48 29.21,45.72 34.8,45.72 35.31,45.21 35.31,23.37
VIN on TOP (solid shape): 61.62,24.82 61.62,22.3 60.91,21.59 60.91,20.78 60.89,20.73 60.88,20.68 60.87,20.62 60.86,20.57 60.85,20.52 60.85,20.46 60.85,20.41 60.85,19.75 60.83,19.74 59.28,19.74 59.16,19.86 58.17,19.86 57.45,19.15 57.45,15.29 57.15,14.99 54.36,14.99 53.87,15.47 53.87,21.62 54.38,22.12 56.39,22.12 57.15,22.89 57.15,24.89 57.38,25.12 61.32,25.12
VIN on TOP: 49.53,7.62 51.05,7.62 51.31,7.87 51.31,10.92 51.05,11.18 49.53,11.18 49.28,10.92 49.28,7.87
VIN on TOP: 27.18,6.86 33.27,6.86 34.54,8.13 37.08,8.13 37.59,8.64 37.59,10.41 36.32,11.68 36.32,13.97 36.07,14.22 36.07,15.49 35.81,15.75 29.46,15.75 28.19,14.48 28.19,11.94 26.42,10.16 26.42,7.62
VIN on TOP: 53.8,42.49 56.59,42.49 56.9,42.8 56.9,46.66 57.61,47.37 58.6,47.37 58.72,47.24 60.27,47.24 60.35,47.32 60.35,49.1 61.06,49.81 61.06,52.32 60.76,52.63 60.71,52.63 60.5,52.83 57.4,52.83 56.9,52.32 56.9,50.29 56.24,49.63 53.82,49.63 53.31,49.12 53.31,42.98
VIN on BOTTOM: 33.02,52.58 35.56,52.58 35.81,52.32 35.81,49.28 35.56,49.02 33.02,49.02 32.77,49.28 32.77,52.32
VIN on VCC: 32.77,52.32 33.02,52.58 56.13,52.58 57.15,53.59 59.69,53.59 60.2,53.09 60.2,51.05 59.18,50.04 59.18,26.67 60.71,25.15 60.71,22.61 59.18,21.08 59.18,5.84 58.17,4.83 25.91,4.83 24.64,6.1 24.64,8.38 28.19,11.94 28.19,14.22 29.72,15.75 35.81,15.75 39.12,12.45 39.12,11.18 40.13,10.16 46.74,10.16 48.01,11.43 51.05,11.43 53.85,14.22 53.85,46.99 51.31,49.53 33.27,49.53 32.77,50.04
N926709 on TOP: 48.26,6.6 47.5,6.6 47.24,6.35 47.24,4.57 47.5,4.32 51.05,4.32 51.56,4.83 51.56,6.86 51.31,7.11 48.77,7.11
N926755 on TOP: 42.16,16 41.91,15.75 41.91,13.97 41.66,13.72 37.08,13.72 36.83,13.46 36.83,11.94 37.08,11.68 42.42,11.68 43.18,12.45 43.18,15.75 42.93,16
N965642 on TOP: 62.51,49.23 62.51,47.17 62.64,47.04 63.53,47.04 63.68,47.19 63.68,49.25 63.93,49.5 66.83,49.5 67.13,49.81 67.13,52.81 66.9,53.04 62.76,53.04 62.33,52.6 62.33,49.4
N965642 on BOTTOM: 51.84,49.45 67.26,49.45 67.74,49.94 67.74,52.96 67.26,53.44 52.17,53.44 51.54,52.81 51.54,49.76
N965955 on TOP (solid shape): 67.69,25.3 67.69,22.3 67.39,22 64.49,22 64.24,21.74 64.24,19.68 64.08,19.53 63.2,19.53 63.15,19.57 63.15,20.41 63.15,20.46 63.15,20.52 63.14,20.57 63.13,20.62 63.12,20.68 63.11,20.73 63.09,20.78 63.07,20.84 63.07,21.72 62.89,21.89 62.89,25.1 63.32,25.53 67.46,25.53
N965955 on BOTTOM: 52.1,22.25 52.1,25.3 52.73,25.93 67.82,25.93 68.3,25.45 68.3,22.43 67.82,21.95 52.4,21.95
N970971 on TOP: 26.16,10.92 26.16,7.87 25.91,7.62 25.65,7.62 25.4,7.87 25.4,11.18 23.62,12.95 23.62,17.53 24.13,18.03 26.92,18.03 27.69,17.27 27.69,12.45
N970971 on BOTTOM: 25.91,7.37 28.19,7.37 28.7,7.87 28.7,11.43 27.69,12.45 27.69,17.27 26.92,18.03 25.65,18.03 25.15,17.53 25.15,8.13
N974356 on TOP (solid shape): 61.09,17.45 61.09,9.55 60.78,9.25 54.46,9.25 53.95,9.75 53.95,12.19 54.79,13.03 57.63,13.03 58.42,13.82 58.85,13.82 59.94,14.91 59.94,17.48 60.07,17.6 60.93,17.6
N974481 on TOP (solid shape): 67.87,13.16 67.87,7.9 67.34,7.37 63.37,7.37 63.04,7.7 63.04,13.16 63.6,13.72 67.31,13.72
N974481 on BOTTOM: 51.66,7.75 51.66,10.79 52.3,11.43 67.39,11.43 67.87,10.95 67.87,7.92 67.39,7.44 51.97,7.44
N975120 on TOP: 60.53,44.96 60.53,37.06 60.22,36.75 53.9,36.75 53.39,37.26 53.39,39.88 53.59,39.88 54.61,40.89 57.73,40.89 58.17,41.33 58.29,41.33 59.39,42.42 59.39,44.98 59.51,45.11 60.38,45.11
N975748 on TOP: 63.04,41.22 66.75,41.22 67.31,40.67 67.31,35.41 66.78,34.87 62.81,34.87 62.48,35.2 62.48,40.67
N975748 on BOTTOM: 51.41,34.95 66.83,34.95 67.31,35.43 67.31,38.46 66.83,38.94 51.74,38.94 51.1,38.3 51.1,35.26
N978475 on BOTTOM: 60.68,18.16 63.14,18.16 63.32,17.98 63.32,15.14 63.17,14.99 60.6,14.99 60.4,15.19 60.4,17.88
N978501 on BOTTOM: 52.7,18.11 55.17,18.11 55.35,17.93 55.35,15.09 55.19,14.94 52.63,14.94 52.43,15.14 52.43,17.83
N978505 on BOTTOM: 57.96,18.16 58.34,17.98 58.73,18.16 59.16,18.16 59.33,17.98 59.33,15.14 59.18,14.99 56.62,14.99 56.41,15.19 56.41,17.88 56.69,18.16
N978542 on BOTTOM: 64.67,18.24 67.13,18.24 67.31,18.06 67.31,15.21 67.16,15.06 64.59,15.06 64.39,15.27 64.39,17.96
N978748 on BOTTOM: 51.87,45.34 51.87,42.65 52.07,42.44 54.64,42.44 54.79,42.6 54.79,45.44 54.61,45.62 52.15,45.62
N978752 on BOTTOM: 63.83,45.47 63.83,42.77 64.03,42.57 66.6,42.57 66.75,42.72 66.75,45.57 66.57,45.75 64.11,45.75
N978756 on BOTTOM: 59.84,45.39 59.84,42.7 60.05,42.49 62.61,42.49 62.76,42.65 62.76,45.49 62.59,45.67 60.12,45.67
N978760 on BOTTOM: 55.85,45.39 55.85,42.7 56.06,42.49 58.62,42.49 58.78,42.65 58.78,45.49 58.6,45.67 56.13,45.67
N980521 on TOP: 6.35,6.35 8.51,6.35 8.76,6.1 8.76,1.27 8.51,1.02 6.48,1.02 6.22,1.27 6.22,6.22
N9251661 on TOP: 45.97,6.35 45.97,4.83 46.23,4.57 46.74,4.57 46.99,4.83 46.99,6.35 47.5,6.86 47.5,12.19 47.24,12.45 45.97,12.45 45.72,12.19 45.72,10.16 45.47,9.91 45.47,6.86
N9263520 on TOP: 40.64,13.97 41.15,13.97 41.4,14.22 41.4,15.75 41.91,16.26 41.91,21.34 41.15,22.1 38.86,22.1 38.61,21.84 38.61,19.56 39.88,18.29 39.88,16 40.64,15.24

## Text on the board
User.7: FIGURE | FINISHED_SIZE | 12.0 | 40.0 | 55.118x31.5 | 62.988x31.5 | 78.74x78.74 | DRILL CHART: TOP to BOTTOM | ALL UNITS ARE IN MILS | ROTATION | - | 90.000 | 0.000 | PLATED | QTY | 226 | 11 | 5 | 2 | 4
